# Altium PCB innovation-board.PcbDoc
Units mil, origin at the board's own origin, x right, y up, seen from the top; angles counter-clockwise.
Board outline 2000.98 x 1901.01 mil, 2 copper layers (Top Layer, Bottom Layer); 39 components, 47 nets, 163 pads, 104 vias.
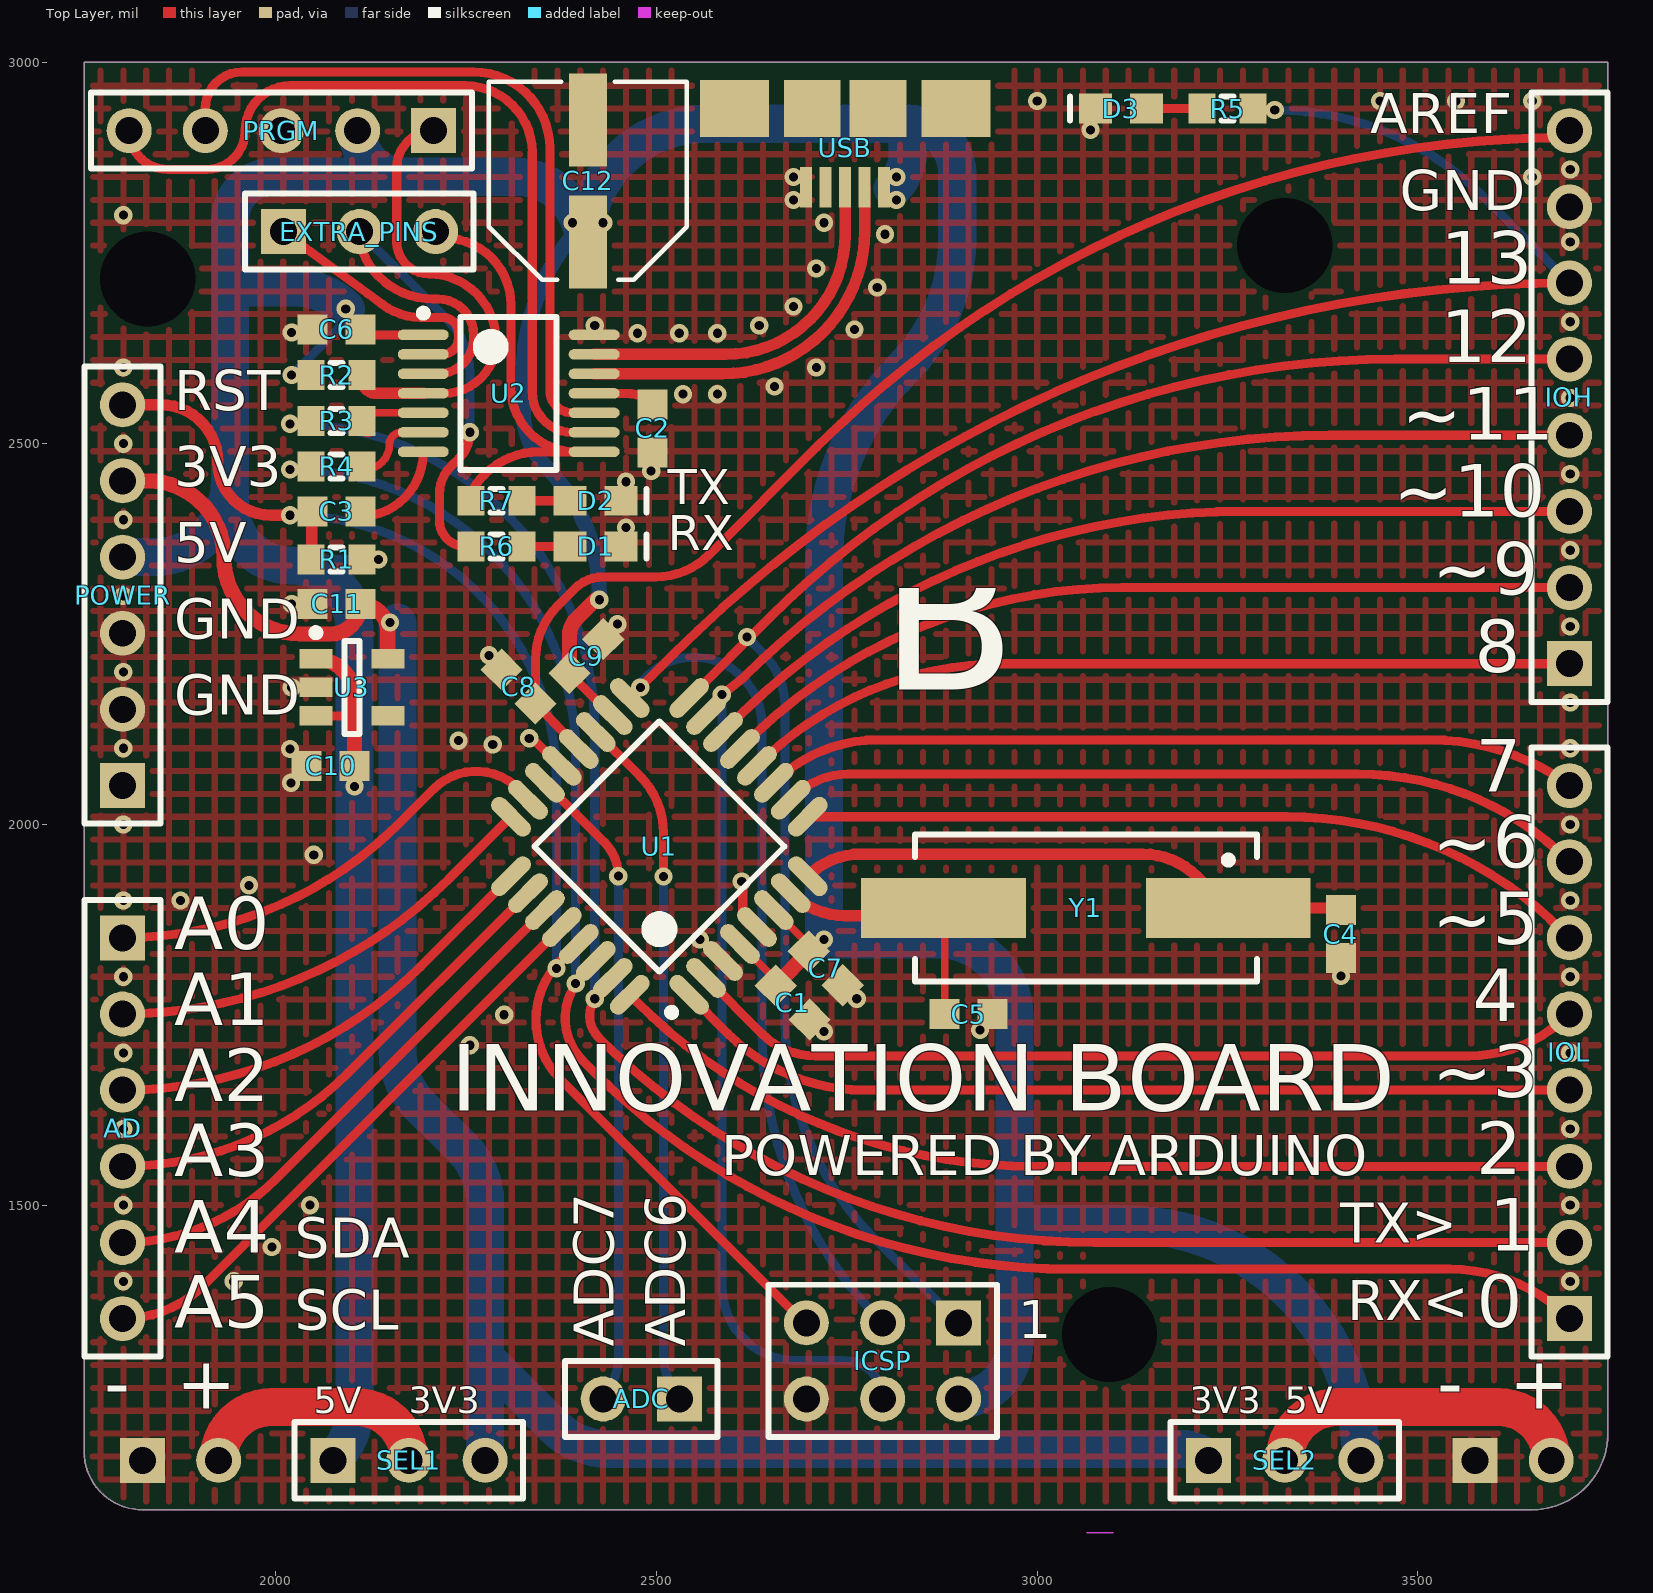
[diagram p0: Top Layer view]
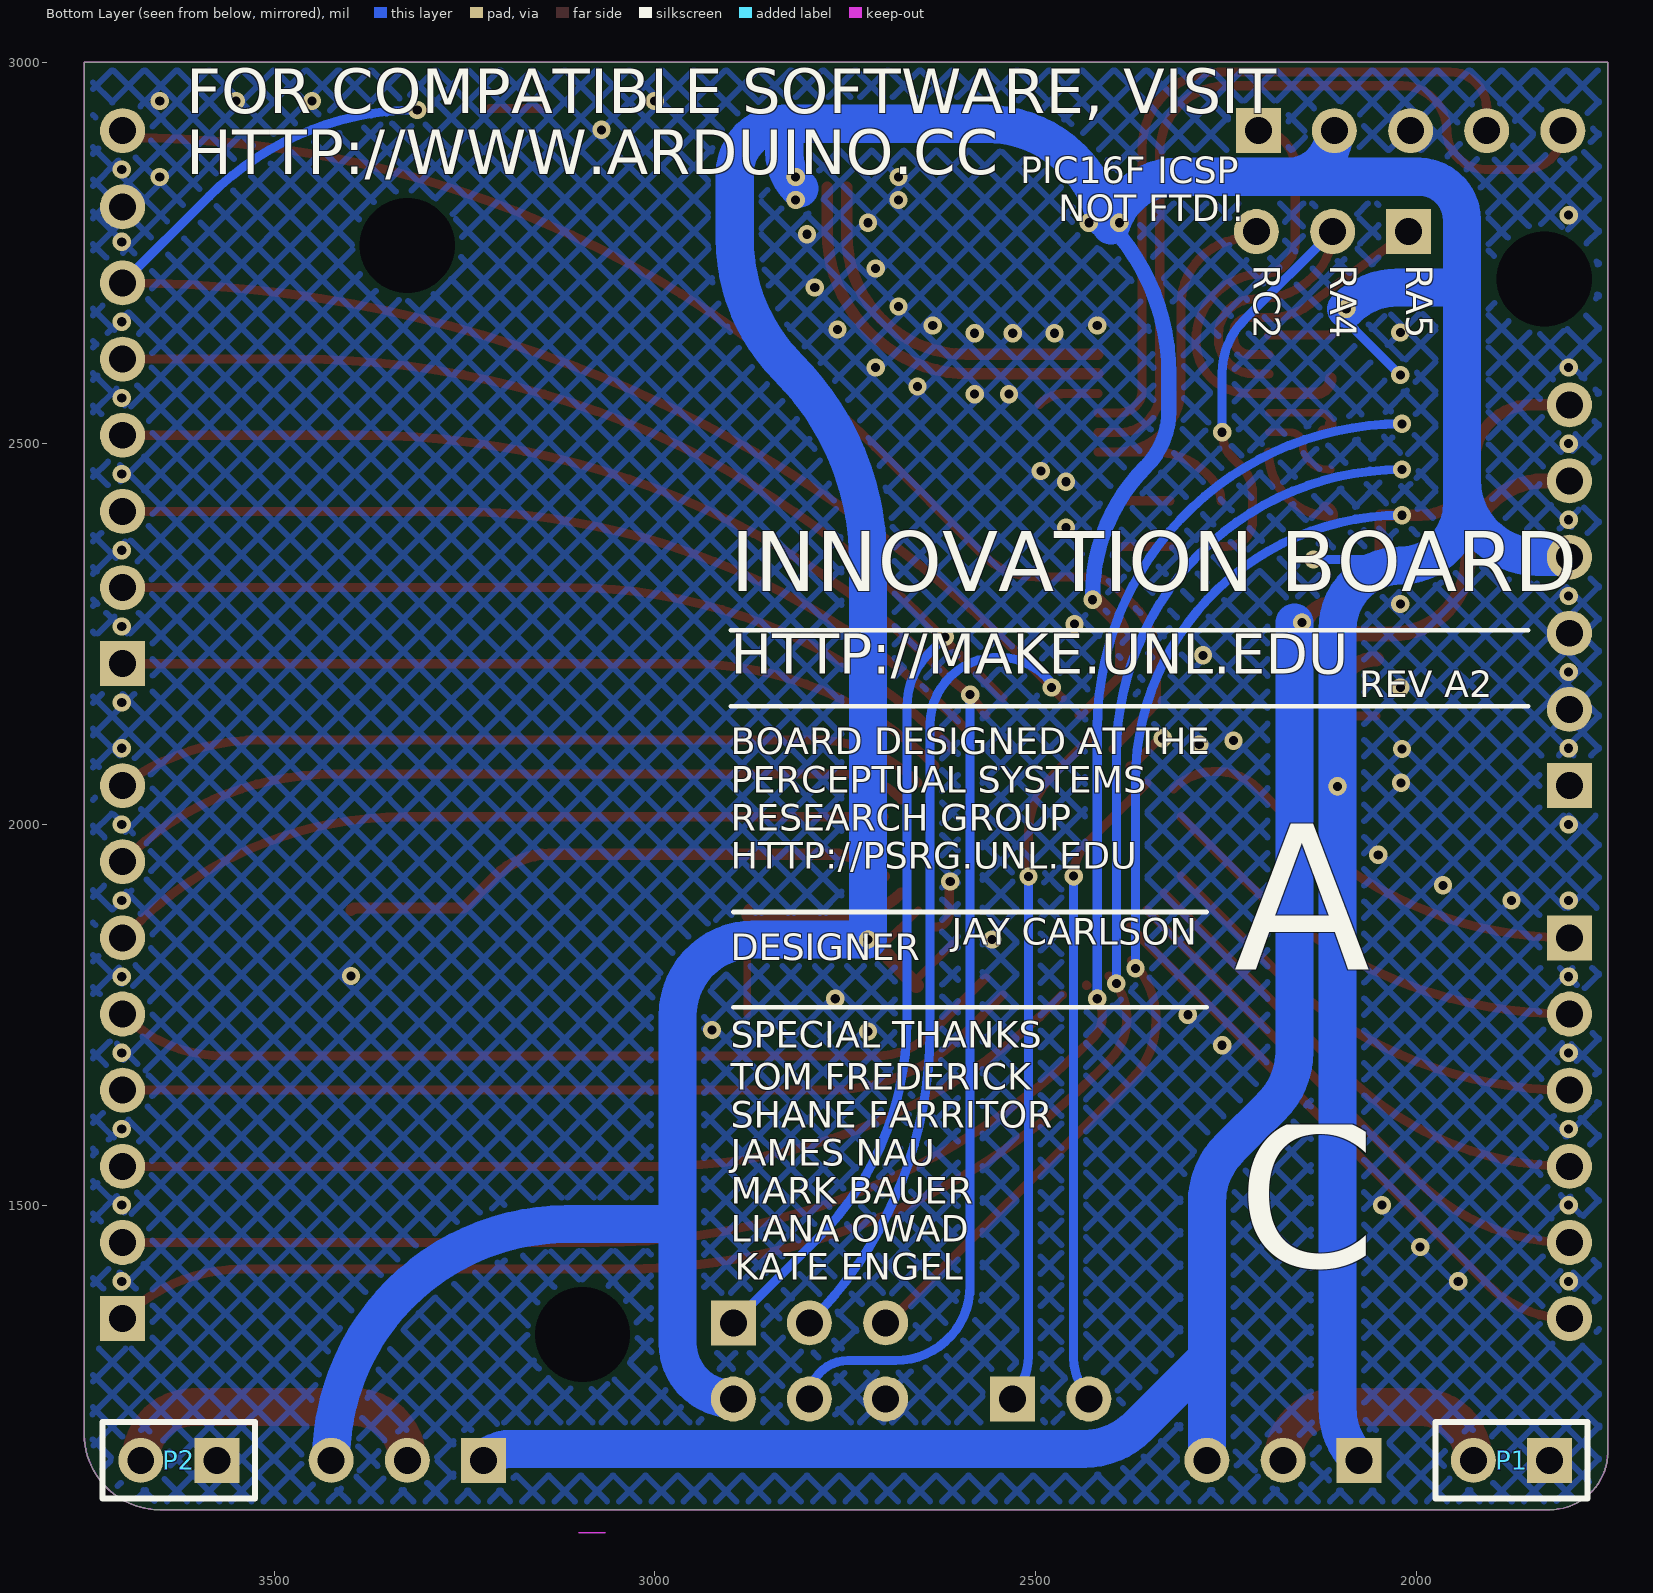
[diagram p1: Bottom Layer view, seen from below]
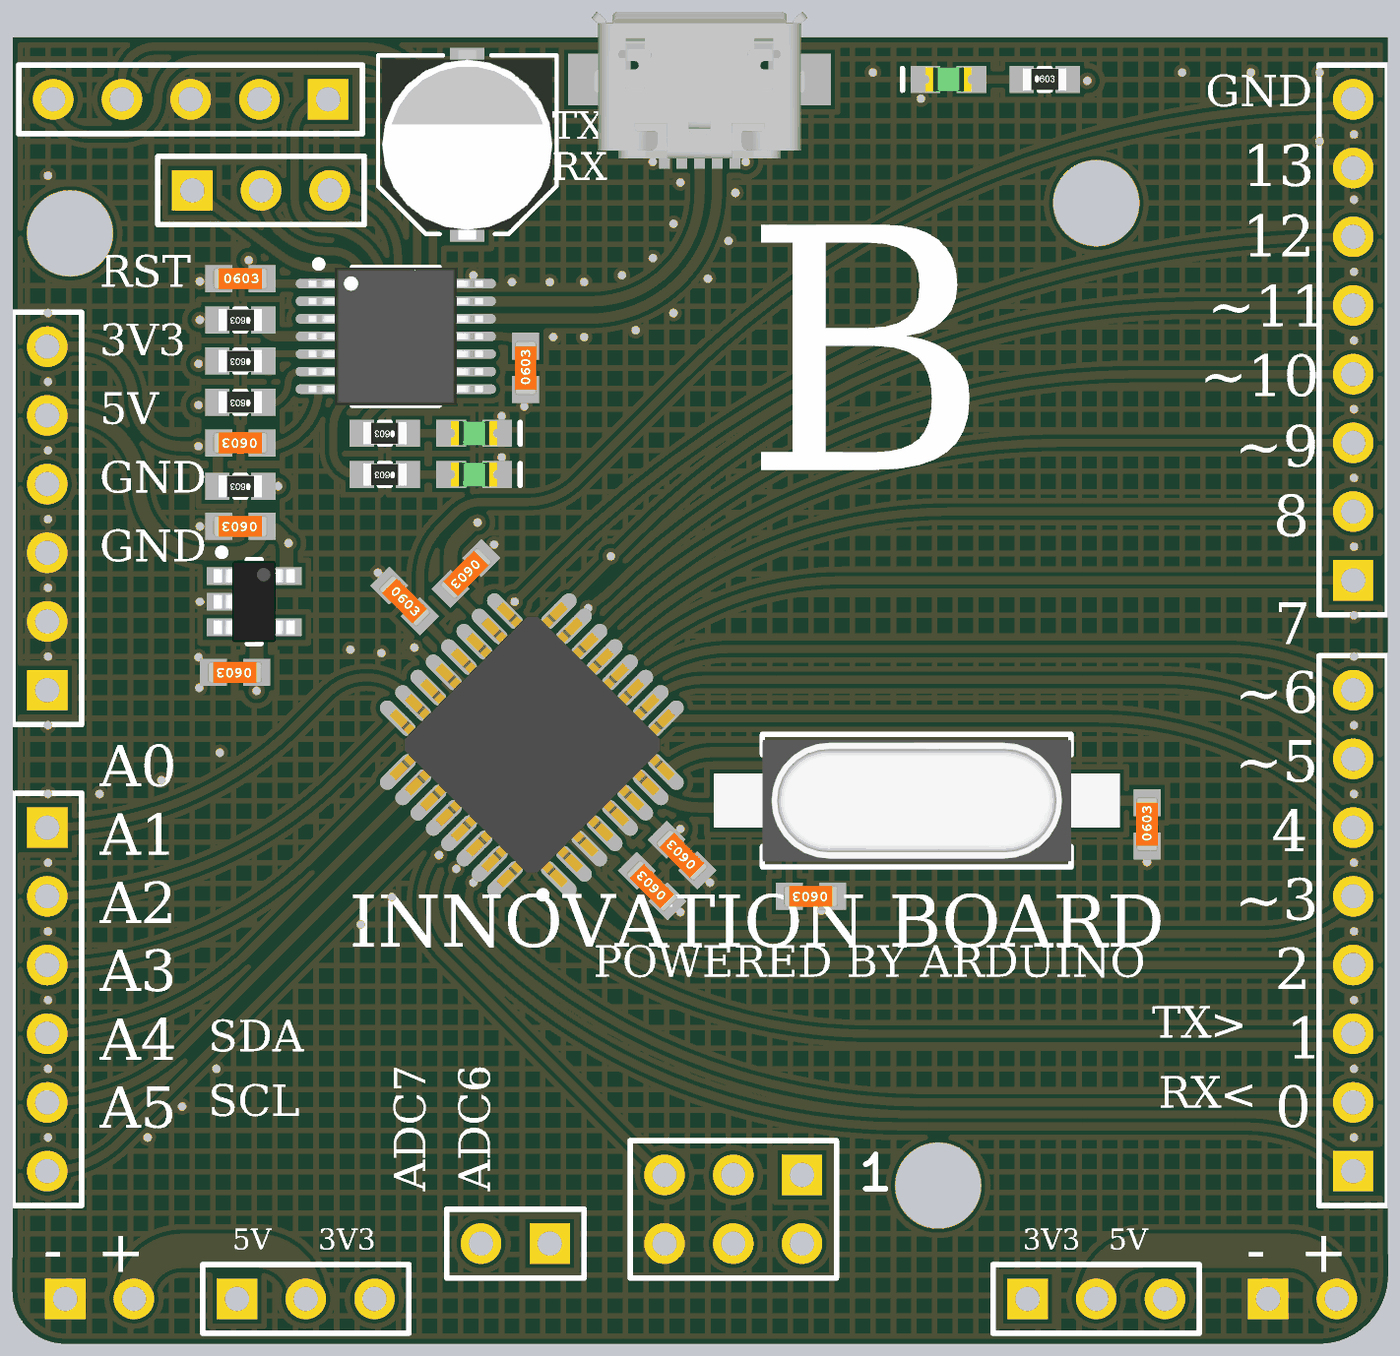
[diagram p2: 3D render of the assembled board from above, using the file's embedded part models]

## Layer stack, top to bottom
Top Solder: solder mask 0.4, Solder Resist, Dk 3.5
Top Layer: signal copper 1.4
Dielectric 1: dielectric 12.6, FR-4, Dk 4.8
Bottom Layer: signal copper 1.4
Bottom Solder: solder mask 0.4, Solder Resist, Dk 3.5

## Board outline
1748.42,1176.58 ccw(c1825,1176.58) 1825,1100 3649.4,1100 ccw(c3649.4,1200) 3749.4,1200 3749.4,1230.24 3748.9,1230.24 3748.9,3001.01 1748.9,3001.01 1748.9,1225 1748.42,1225

## Design rules (kind name [scope] priority, off if disabled: settings)
Clearance [All] p1: gap=6
DiffPairsRouting [All] p1: maxlimit=10 minlimit=6 mostfreqgap=10 toplayer_minwidth=6 toplayer_maxwidth=15 toplayer_prefwidth=8 bottomlayer_minwidth=6 bottomlayer_maxwidth=15 bottomlayer_prefwidth=8 maxuncoupledlength=500
HoleSize [All] p1: absolutevalues=TRUE maxlimit=500 minlimit=12 maxpercent=80.000 minpercent=20.000
PlaneConnect [All] p1: planeconnectstyle=Direct reliefexpansion=20 reliefentries=4 reliefconductorwidth=10 reliefairgap=10
PolygonConnect [All] p1: connectstyle=Direct reliefconductorwidth=10 reliefentries=4 polygonreliefangle="90 Angle" airgapwidth=10
RoutingVias [All] p1: holewidth=12 width=24 viastyle="Through Hole" minholewidth=12 minwidth=24 maxholewidth=28 maxwidth=50
SolderMaskExpansion [All] p1: expansion=0
Width [All] p1: maxlimit=500 minlimit=6 preferedwidth=8
26 further rules are at their usual default settings.

## Components (designator, comment, footprint, x,y, rotation, side; value= is the part's Value field where it differs from the comment)
AD "Female Header 6" HDR1X6 1798.9,1851.02 r270 top
ADC "DNI" HDR1X2 2530,1245.5 r180 top
C1 "100n" CAPC1608N 2678.9,1766.02 r135 top
C2 "1u 16V" CAPC1608N 2495,2520 r90 top
C3 "100n" CAPC1608N 2080,2411.01 r180 top
C4 "22p" CAPC1608N 3398.9,1856.02 r90 top
C5 "22p" CAPC1608N 2910,1751 r180 top
C6 "100n" CAPC1608N 2080,2650 r0 top
C7 "100n" CAPC1608N 2722.29,1811.02 r135 top
C8 "100n" CAPC1608N 2318.9,2181.01 r315 top
C9 "100n" CAPC1608N 2408,2221 r225 top
C10 "1u 16V" CAPC1608N 2072.04,2076.8 r180 top
C11 "1u 16V" CAPC1608N 2080,2289.46 r180 top
C12 "100u 6.3x5.4" CAP_63X54 2410,3015 r0 top
D1 "GREEN" LTST-C190GKT 2420,2365 r0 top
D2 "GREEN" LTST-C190GKT 2420,2425 r0 top
D3 "GREEN" LTST-C190GKT 3110,2940 r180 top
EXTRA_PINS "DNI" HDR1X3 2010,2778.5 r0 top
ICSP "DNI" HDR2X3 2896.93,1345.5 r180 top
IOH "Female Header 8" HDR1X8 3698.9,2211.01 r90 top
IOL "Female Header 8" HDR1X8 3698.9,1351.02 r90 top
P1 "DNI" HDR1X2 1825,1165 r0 bottom
P2 "DNI" HDR1X2 3575,1165 r0 bottom
POWER "Female Header 6" HDR1X6 1798.9,2051.01 r90 top
PRGM "DNI" HDR1X5 2207.54,2911.01 r180 top (schematic designator ICSP)
R1 "10k" RESC1608N 2080,2347.98 r180 top
R2 "10k" RESC1608N 2080,2590 r180 top
R3 "1k" RESC1608N 2080,2530 r180 top
R4 "1k" RESC1608N 2080,2470 r180 top
R5 "1k" RESC1608N 3250,2940 r0 top
R6 "1k" RESC1608N 2290,2365 r180 top
R7 "1k" RESC1608N 2290,2425 r180 top
SEL1 "DNI" HDR1X3 2075,1165 r0 top
SEL2 "DNI" HDR1X3 3225,1165 r0 top
U1 "ATMEGA328P-AUR" QFP80P900X900-32N 2503.9,1971.02 r135 top
U2 "PIC16F1454-I/ST" TSOP65P640-14AN 2306,2566 r0 top
U3 "AAT3221IGV-3.3-T1" SOT23-5AN 2100,2179.86 r0 top
USB "USB Micro B Receptacle" 10104110-0001LF 2747.88,2810.01 r180 top
Y1 "16MHz" HC49/4H_SMX 3063.9,1890.23 r180 top

## Footprints (in the part's own frame and the unit in brackets; to place one, negate y for a bottom-side part, rotate by r counter-clockwise, add the part's x,y. Pads: shape width x height; smd on the part's side, far side on the other; paste and mask are expansions set on the pad)
10104110-0001LF [mm]
  rect 2.3x1.9 smd: 0(-3.7,-3.3) 0(3.7,-3.3)
  rect 1.9x1.9 smd: 0(-1.1,-3.3) 0(1.1,-3.3)
  rect 0.4x1.35 smd: 1(-1.3,-0.675) 2(-0.65,-0.675) 3(0,-0.675) 4(0.65,-0.675) 5(1.3,-0.675)
  body extent -3.99,-5.8 3.99,-0.38, height 2.63
CAP_63X54 [mm] "Capacitor, Aluminum Electrolytic, 6.3mm diameter, 5.4mm height"
  rect 1.27x3.1 smd: 1(0,-6.35) 2(0,-2.286)
  silkscreen extent -3.3,-7.62 3.3,-1.02, body extent -3.15,-7.82 3.15,-0.82, height 6.62
CAPC1608N [mm] "Chip Capacitor (0603), Body 1.6x0.8mm, IPC Medium Density"
  rect 1x1 smd: 1(-0.8,0) 2(0.8,0)
  body extent -1,-0.39 1,0.39, height 0.79
HC49/4H_SMX [mm] "Quartz Crystal, SM; Body 13.4 (inc. leads) x 4.9 mm (LxW max)"
  rect 5.5x2 smd: 1(-4.75,0) 2(4.75,0)
  silkscreen extent -5.7,-2.45 5.7,2.45, body extent -7.5,-2.25 7.5,2.25, height 4.22
HDR1X2 [mm] "Connector; Header; 2 Position"
  rect 1.5x1.5 hole 0.9: 1(0,0)
  round 1.5 hole 0.9: 2(2.54,0)
  silkscreen extent -1.27,-1.27 3.81,1.27
HDR1X3 [mm] "Connector; Header; 3 Position"
  rect 1.5x1.5 hole 0.9: 1(0,0)
  round 1.5 hole 0.9: 2(2.54,0) 3(5.08,0)
  silkscreen extent -1.27,-1.27 6.35,1.27
HDR1X5 [mm] "Connector; Header; 5 Position"
  rect 1.5x1.5 hole 0.9: 1(0,0)
  round 1.5 hole 0.9: 2(2.54,0) 3(5.08,0) 4(7.62,0) 5(10.16,0)
  silkscreen extent -1.27,-1.27 11.43,1.27
HDR1X6 [mm] "Connector; Header; 6 Position"
  rect 1.5x1.5 hole 0.9: 1(0,0)
  round 1.5 hole 0.9: 2(2.54,0) 3(5.08,0) 4(7.62,0) 5(10.16,0) 6(12.7,0)
  silkscreen extent -1.27,-1.27 13.97,1.27
HDR1X8 [mm] "Connector; Header; 8 Position"
  rect 1.5x1.5 hole 0.9: 1(0,0)
  round 1.5 hole 0.9: 2(2.54,0) 3(5.08,0) 4(7.62,0) 5(10.16,0) 6(12.7,0) 7(15.24,0) 8(17.78,0)
  silkscreen extent -1.27,-1.27 19.05,1.27
HDR2X3 [mm] "Connector; Header; 3x2 Position"
  rect 1.5x1.5 hole 0.9: 1(0,0)
  round 1.5 hole 0.9: 2(0,2.54) 3(2.54,0) 4(2.54,2.54) 5(5.08,0) 6(5.08,2.54)
  silkscreen extent -1.27,-1.27 6.35,3.81
LTST-C190GKT [mm] "Blue LED, 0603"
  rect 1.1x1 smd: 1(-0.85,0) 2(0.85,0)
  silkscreen extent 1.7,-0.4 1.7,0.4, body extent -0.85,-0.45 0.85,0.45, height 0.9
QFP80P900X900-32N [mm] "32-Pin Quad Flat Pack 0.8 mm Pitch"
  oval 1.65x0.55 smd: 1(-4.2,2.8) 2(-4.2,2) 3(-4.2,1.2) 4(-4.2,0.4) 5(-4.2,-0.4) 6(-4.2,-1.2) 7(-4.2,-2) 8(-4.2,-2.8) 17(4.2,-2.8) 18(4.2,-2) 19(4.2,-1.2) 20(4.2,-0.4) 21(4.2,0.4) 22(4.2,1.2) 23(4.2,2) 24(4.2,2.8)
  oval 0.55x1.65 smd: 9(-2.8,-4.2) 10(-2,-4.2) 11(-1.2,-4.2) 12(-0.4,-4.2) 13(0.4,-4.2) 14(1.2,-4.2) 15(2,-4.2) 16(2.8,-4.2) 25(2.8,4.2) 26(2,4.2) 27(1.2,4.2) 28(0.4,4.2) 29(-0.4,4.2) 30(-1.2,4.2) 31(-2,4.2) 32(-2.8,4.2)
  silkscreen extent -4.32,-2.95 2.95,3.75, body extent -4.5,-4.52 4.5,4.48, height 1.6
RESC1608N [mm] "Chip Resistor, Body 1.6x0.8mm, IPC Medium Density"
  rect 0.9x1 smd: 1(-0.85,0) 2(0.85,0)
  silkscreen extent -0.2,-0.4 0.2,0.4, body extent -0.8,-0.41 0.8,0.41, height 0.45
SOT23-5AN [mm] "SOT23, 5-Leads, Body 2.9x1.6mm, Pitch 0.95mm, Lead Span 2.8mm, IPC Medium Density"
  rect 1.1x0.65 smd: 1(-1.2,0.95) 2(-1.2,0) 3(-1.2,-0.95) 4(1.2,-0.95) 5(1.2,0.95)
  silkscreen extent -1.32,-1.55 0.25,1.95, body extent -1.5,-1.5 1.5,1.5, height 1.3
TSOP65P640-14AN [mm] "TSOP, 14-Leads, Body 5x4.4mm, Pitch 0.65mm, IPC Medium Density"
  oval 1.7x0.35 smd: 1(-2.85,1.95) 2(-2.85,1.3) 3(-2.85,0.65) 4(-2.85,0) 5(-2.85,-0.65) 6(-2.85,-1.3) 7(-2.85,-1.95) 8(2.85,-1.95) 9(2.85,-1.3) 10(2.85,-0.65) 11(2.85,0) 12(2.85,0.65) 13(2.85,1.3) 14(2.85,1.95)
  silkscreen extent -2.97,-2.55 1.6,2.8, body extent -3.23,-2.55 3.23,2.55, height 1.25

## Part data
AD POWER: library part "Header 6", "Female Header, 6-Pin"
ADC P1 P2: library part "Header 2", "Header, 2-Pin"
C1 C2 C3 C4 C5 C6 C7 C8 C9: library part "Cap Semi", "Capacitor (Semiconductor SIM Model)"
C10 C11: library part "Cap Semi", "MC0402X105M6R3CT"
C12: library part "Cap Pol1", "Polarized Capacitor (Radial)"
D1 D2 D3: library part LED_GREEN, "Typical greenGaAs LED"
EXTRA_PINS SEL1 SEL2: library part "Header 3", "Header, 3-Pin"
ICSP: library part "Header 3X2", "Header, 3-Pin, Dual row"
IOH IOL: library part "Header 8", "Female Header, 8-Pin"
PRGM: library part "Header 5", "Header, 5-Pin"
R1 R2 R3 R4 R5 R6 R7: library part "Res Semi", "Semiconductor Resistor"
U1: "ATMEL - ATMEGA328P-AUR - MCU, 8BIT, ATMEGA, 20MHZ, TQFP-32"
U2: "8-bit Microcontrollers - MCU 7 KB Flash 512 bytes RAM 48 MHz Int Osc"
U3: "3V3 Regulator"
Y1: library part XTAL, "Crystal Oscillator (2 pin)"

## Free pads (board coordinates)
  round 60 hole 125: MH(1832,2716) MH(3095,1330) MH(3325,2760)

## Via types
v1: diameter 24, hole 12, Top Layer to Bottom Layer, tented both sides, 104 vias

## Nets (pads, with @x,y where several pads share a name; then routed paths per layer and width w, separated by ;. In a path a pad name is that pad's centre, name@x,y a point inside that pad or via, vN(x,y) a via of type N, cw(c..) or ccw(c..) an arc to the next point about the centre after c; other vN are vias at no path point)
3V3: C11.1 POWER.5 SEL1.3 SEL2.1 U3.5 | length 2681.3
  Top Layer w20: POWER.5 1832,2451.01 cw(c1832,2351.01) 1932,2351.01 1932,2350 ccw(c2032,2350) 2032,2250 2072.04,2250 ccw(c2072.04,2289.46) C11.1 cw(c2111.5,2253.71) 2147.24,2253.71 U3.5
  Bottom Layer w50: v1@2160.21,2265 2160.21,1701.21 ccw(c2260.21,1701.21) 2189.5,1630.5 2245.71,1574.29 cw(c2175,1503.58) 2275,1503.58 2275,1300 ; SEL1.3 2275,1300 ; SEL2.1 ccw(c3188.79,1128.79) 3188.79,1180 2436.42,1180 cw(c2436.42,1280) 2365.71,1209.29 2275,1300
  other v1: 2150,2265
5V: C1.2 C6.2 C7.2 C9.2 C10.1 C12.1 ICSP.2 POWER.4 PRGM.2 R1.1 R2.2 SEL1.1 SEL2.3 U1.4 U1.6 U1.18 U2.1 U3.1 U3.3 USB.1 | length 7423.6
  Top Layer w10: U1.4 2656.63,1796.02 C1.2 ; U1.6 C7.2@2700.02,1841.71
  Top Layer w12: U3.3 2101.07,2142.46 cw(c2101.07,2140) 2103.53,2140 ; C6.2@2110.5,2645 ccw(c2112.72,2645) 2112.72,2642.77 U2.1 ; C9.2 2439.56,2144.9 ccw(c2442.65,2147.99) U1.18
  Top Layer w20: U3.1 cw(c2052.76,2166.49) 2103.53,2166.49 2103.53,2140 C10.1 ; C9.2 2385.73,2247.62 cw(c2417.38,2247.62) 2395,2270 2420,2295 v1(2425,2295) ; C1.2 C7.2
  Bottom Layer w12: 1991.87,2345.47 cw(c2000.56,2331.71) 2000.56,2347.98 v1(2135,2347.98) ; v1(2021,2590) 2080.69,2649.69 ccw(c2053.37,2677) v1(2092,2677)
  Bottom Layer w20: 2408.81,2794.71 ccw(c2611.15,2592.37) 2401,2786.59 ccw(c2611.15,2592.37) 2325,2592.37 2325,2542.43 ccw(c2427.43,2542.43) 2355,2470 cw(c2186.01,2301.01) 2425,2301.01 v1(2425,2295)
  Bottom Layer w50: POWER.4 1840,2351.01 ccw(c1840,2451.01) 1940,2451.01 ; SEL1.1 ccw(c2006.12,1233.88) 2103.53,1233.88 v1(2103.53,2050) 2103.53,2256.47 ccw(c2020,2256.47) 2020,2340 cw(c2020,2420) 1940,2420 1940,2451.01 ; v1(2092,2677) ccw(c2024.4,2609.4) 2024.4,2705 1940,2705 ; PRGM.2 ccw(c2168.07,2911.01) 2168.07,2850.49 ; v1@2401,2786.59 ccw(c2314.51,2760) 2314.51,2850.49 2168.07,2850.49 ; 2408.81,2794.71 cw(c2565,2760) 2565,2920 2830,2920 ; 2810,2835 ccw(c2761.72,2883.28) 2830,2883.28 2830,2920 ; ICSP.2 ccw(c2896.93,1318.57) 2970,1318.57 2970,1475 ; SEL2.3 ccw(c3115,1165) 3115,1475 2970,1475 ; 1940,2451.01 1940,2705 ; 1940,2705 1940,2793.32 cw(c1997.16,2793.32) 1997.16,2850.49 2168.07,2850.49 ; 2830,2920 cw(c2830,2855) 2895,2855 2895,2768.99 cw(c2656.01,2768.99) 2825,2600 ccw(c3078.49,2346.51) 2720,2346.51 v1(2720,1849) 2870,1849 cw(c2870,1749) 2970,1749 2970,1475
  other v1: 2390,2790 2430,2790 2815,2820 2815,2850
AD0: AD.1 U1.23 | length 591.3
  Top Layer w12: AD.1 ccw(c1798.9,2365.18) 2162.47,2001.61 2207.54,2046.68 cw(c2263.22,1991.01) U1.23@2318.9,2046.68
AD1: AD.2 U1.24 | length 591.3
  Top Layer w12: AD.2 ccw(c1798.9,2357.35) 2227.65,1928.61 U1.24
AD2: AD.3 U1.25 | length 602.7
  Top Layer w12: AD.3 ccw(c1798.9,2204.12) 2190,1813.01 U1.25
AD3: AD.4 U1.26 | length 663
  Top Layer w12: AD.4 ccw(c1798.9,1970.23) 2095.33,1673.8 U1.26
ADC6: ADC.1 U1.19 | length 908.2
  Top Layer w12: U1.19 2478.53,2063.2 cw(c2404.28,1988.95) 2509.28,1988.95 v1(2509.28,1931.73)
  Bottom Layer w12: v1(2509.28,1931.73) 2509.28,1301.03 ccw(c2580.01,1301.03) ADC.1@2530,1251.01
ADC7: ADC.2 U1.22 | length 846.1
  Top Layer w12: U1.22 2431.57,1976.53 cw(c2387.08,1932.04) v1(2450,1932.04)
  Bottom Layer w12: ADC.2@2430,1251.02 ccw(c2381.72,1299.3) 2450,1299.3 v1(2450,1932.04)
AREF: C8.2 IOH.8 U1.20 | length 1787.6
  Top Layer w12: C8.2 C8.2@2341.17,2159.09 ; U1.20 2341.35,2158.91 C8.2@2341.17,2159.09 ; 3600.16,2898.73 cw(c3699.31,1174.89) 3619.11,2899.72 ; 3630.26,2900.2 ccw(c3699.31,1174.89) 3619.11,2899.72 ; 3660.38,2901.14 cw(c3699.31,1174.89) 3690.5,2901.56 ccw(c3690.52,1515.9) 3619.11,2899.72 ; C8.2@2341.17,2159.09 2341.17,2216.48 cw(c2441.17,2216.48) 2370.46,2287.19 2392.91,2309.64 cw(c2430,2272.55) 2430,2325 2498.58,2325 ccw(c2498.58,2425) 2569.29,2354.29 2710.71,2495.71 cw(c3690.52,1515.9) 3619.11,2899.72
D_N: U2.12 USB.2 | length 520
  Top Layer w15: U2.12 2586.56,2591.59 ccw(c2586.56,2778.5) 2773.48,2778.5 USB.2
D_P: U2.13 USB.3 | length 481.6
  Top Layer w15: U2.13 2590.73,2617.18 ccw(c2590.73,2774.33) 2747.88,2774.33 USB.3
DTR: C3.1 U2.7 | length 149.2
  Top Layer w10: C3.1@2110.4,2406.01 C3.1@2110.58,2406.01
  Top Layer w12: C3.1@2109.5,2404 ccw(c2109.5,2488.3) 2193.8,2488.3 U2.7
  Top Layer w15: C3.1@2110.4,2406.01 cw(c2120.4,2406.01) C3.1@2120.4,2416.01
GND: C1.1 C2.1 C4.1 C5.1 C6.1 C7.1 C8.1 C9.1 C10.2 C11.2 C12.2 D1.2 D2.2 D3.2 ICSP.6 IOH.7 P1.1 P2.1 POWER.2 POWER.3 PRGM.3 U1.3 U1.5 U1.21 U2.14 U3.2 USB.5 | length 131.8
  Top Layer w12: v1(2333,2113) 2337,2113 2373.2,2076.8 U1.21 ; v1(2612,1925) 2613.41,1923.59 2613.41,1883.77 ccw(c2631.96,1883.77) U1.5
  Bottom Layer w12: v1@2330,2113 v1(2333,2113)
  other v1: 1800,1400 1945,1400 3700,1400 1995,1445 1800,1500 2045,1500 3700,1500 1800,1600 3700,1600 1800,1700 3700,1700 2255,1710 2720,1728 2925,1730 2300,1750 2763,1771 1800,1800 3700,1800 3398.9,1801.01 2557,1849 1800,1900 1875,1900 3700,1900 1965,1920 2050,1960 1800,2000 3700,2000 2020,2054.53 2018.9,2099.07 1800,2100 3700,2100 2285,2105 2240,2110 3700,2160 2021,2179.86 1800,2200 2280,2222 3700,2260 2449,2263 2021,2289.46 1800,2300 3700,2360 2460,2390 1800,2400 2460,2450 3700,2460 2493,2464 1800,2500 3700,2560 2535,2565 2580,2565 2655,2575 1800,2600 2710,2600 2475,2645 2530,2645 2580,2645 2021,2646 2760,2650 2418.9,2655.01 2635,2655 3700,2660 2680,2680 2790,2705 2710,2730 3700,2765 2800,2775 2720,2790 1800,2800 2680,2820 2680,2850 3650,2850 3700,2860 3070,2912 3000,2950 3450,2950 3550,2950 3650,2950
ICSPCLK: PRGM.5 U2.9 | length 1097.5
  Top Layer w12: PRGM.5 ccw(c1858.56,2911.01) 1858.56,2860 1908.98,2860 ccw(c1908.98,2911.01) 1960,2911.01 cw(c2019,2911.01) 2019,2970.01 2249.07,2970.01 cw(c2249.07,2882.09) 2337,2882.09 2337,2567.24 ccw(c2389.42,2567.24) 2389.42,2514.82 U2.9
ICSPDAT: PRGM.4 U2.10 | length 930.1
  Top Layer w12: PRGM.4@1907.54,2939.94 cw(c1955.62,2939.94) 1955.62,2988.01 2260,2988.01 cw(c2260,2888.01) 2360,2888.01 2360,2570 ccw(c2389.59,2570) 2389.59,2540.41 U2.10
IO2: IOL.3 U1.32 | length 1295.4
  Top Layer w12: U1.32 2473.46,1767.61 ccw(c2996.36,2290.51) 2996.36,1551.01 IOL.3
IO3: IOL.4 U1.1 | length 1197
  Top Layer w12: U1.1 2593.88,1725.14 ccw(c2772.83,1904.09) 2772.83,1651.01 IOL.4
IO4: IOL.5 U1.2 | length 1186.6
  Top Layer w12: U1.2 2638.26,1725.3 ccw(c2708.97,1796.02) 2708.97,1696.02 3566.12,1696.02 ccw(c3566.12,1883.8) IOL.5
IO5: IOL.6 U1.9 | length 1044
  Top Layer w12: U1.9 3328.07,2009.99 cw(c3328.07,1498.52) 3689.73,1860.18 IOL.6
IO6: IOL.7 U1.10 | length 1062.8
  Top Layer w12: U1.10 2680.97,2036.73 cw(c2751.68,1966.02) 2751.68,2066.02 3421.27,2066.01 cw(c3421.27,1673.38) IOL.7
IO7: IOL.8 U1.11 | length 1072.8
  Top Layer w12: U1.11 cw(c2790.59,1918.17) 2790.59,2111.02 3516.17,2111.01 cw(c3516.17,1800.27) 3696.65,2053.23 cw(c3554.05,1906.16) IOL.8
IO8: IOH.1 U1.12 | length 1102.8
  Top Layer w12: U1.12 cw(c2955.98,1752.78) 2955.98,2211.02 IOH.1
IO9: IOH.2 U1.13 | length 1146.9
  Top Layer w12: U1.13 2616.81,2106.2 cw(c3111.29,1611.72) 3111.29,2311.02 IOH.2
MCLR: PRGM.1 R2.1 U2.4 | length 606.4
  Top Layer w12: U2.4 2221,2566 ccw(c2221,2634.53) 2289.53,2634.53 ccw(c2201.1,2634.53) 2201.1,2722.95 cw(c2201.1,2765.06) 2159,2765.06 2159,2862.47 cw(c2207.54,2862.47) PRGM.1
  Top Layer w15: R2.1@2112.36,2586.01 ccw(c2132.36,2586.01) 2132.36,2566.01 U2.4
MISO/IO12: ICSP.1 IOH.5 U1.16 | length 2284.4
  Top Layer w12: U1.16 2647.43,2270.44 cw(c3469.65,1448.22) 3469.65,2611.02 IOH.5
  Bottom Layer w12: v1(2618.9,2246.01) 2639.61,2225.3 cw(c2568.9,2154.59) 2660.73,2194.19 cw(c2568.9,2154.59) 2668.9,2154.59 2668.9,1740.96 ccw(c3073.11,1740.96) 2787.29,1455.15 ICSP.1
MOSI/IO11: ICSP.4 IOH.4 U1.15 | length 2311.7
  Top Layer w12: U1.15 v1(2585.9,2170.37) 2613.41,2191.88 cw(c3383.87,1421.43) 3383.87,2511.02 IOH.4
  Bottom Layer w12: v1(2585.9,2170.37) 2585.9,1394.02 ccw(c2683.9,1394.02) 2683.9,1296.02 2746.42,1296.02 cw(c2746.42,1245.5) ICSP.4
NetC2_2: C2.2 U2.11 | length 80.7
  Top Layer w12: U2.11 2459.98,2566 cw(c2459.98,2516.48) C2.2
NetC4_2: C4.2 U1.8 Y1.1 | length 733.6
  Top Layer w15: U1.8 cw(c2768.72,1862.09) 2768.72,1961.01 3138.7,1961.01 cw(c3138.7,1861.01) 3209.41,1931.73 Y1.1 3392.34,1890.23 cw(c3392.34,1880.95) C4.2
NetC5_2: C5.2 U1.7 Y1.2 | length 349.8
  Top Layer w10: Y1.2 2878.5,1888.62 2878.5,1880.3 C5.2
  Top Layer w15: U1.7 2676.68,1909.59 ccw(c2747.39,1980.3) 2747.39,1880.3 Y1.2@2878.5,1880.3
NetD1_1: D1.1 R6.1 | length 63.1
  Top Layer w12: R6.1 D1.1
NetD2_1: D2.1 R7.1 | length 63.1
  Top Layer w12: R7.1 D2.1
NetD3_1: D3.1 R5.1 | length 73.1
  Top Layer w12: D3.1 R5.1
NetP1_2: P1.2 SEL1.2 | length 329.9
  Top Layer w50: P1.2 cw(c1995,1165) 1995,1235 2105,1235 cw(c2105,1165) SEL1.2
NetP2_2: P2.2 SEL2.2 | length 429.9
  Top Layer w50: SEL2.2 cw(c3395,1165) 3395,1235 3605,1235 cw(c3605,1165) P2.2
RA4: EXTRA_PINS.2 R6.2 U2.3 | length 831.4
  Top Layer w12: EXTRA_PINS.2 ccw(c2191,2778.5) 2133.72,2721.23 2135.67,2719.29 ccw(c2206.38,2790) 2206.38,2690 2213.24,2690 cw(c2213.24,2643.24) 2260,2643.24 2260,2638.35 cw(c2213.24,2638.35) 2213.24,2591.59 U2.3 ; v1(2255,2515) cw(c2206.72,2515) 2240.86,2480.86 2230,2470 ccw(c2266.21,2433.79) 2215,2433.79 2215,2399.14 ccw(c2249.14,2399.14) 2225,2375 ccw(c2249.14,2399.14) 2249.14,2365 R6.2
  Bottom Layer w12: EXTRA_PINS.2 2225.71,2662.79 cw(c2155,2592.08) 2255,2592.08 v1(2255,2515)
RA5: EXTRA_PINS.1 U2.2 | length 341.8
  Top Layer w12: EXTRA_PINS.1 2120.68,2697.12 2139.96,2682.95 ccw(c2190.08,2747.76) 2190.08,2665.83 2218.83,2665.83 cw(c2218.83,2644.66) 2240,2644.66 2240,2638.35 cw(c2218.83,2638.35) 2218.83,2617.18 U2.2
RC2: EXTRA_PINS.3 R7.2 U2.8 | length 571.2
  Top Layer w12: EXTRA_PINS.3@2221,2770 cw(c2221,2681.97) 2309.03,2681.97 2309.03,2573.82 ccw(c2393.62,2573.82) U2.8@2393.62,2489.23 ; R7.2 cw(c2296.46,2425) 2268.23,2453.23 2274.94,2459.94 cw(c2345.65,2389.23) 2345.65,2489.23 U2.8@2393.62,2489.23 ; U2.8 U2.8@2393.62,2489.23
RESET: C3.2 ICSP.5 POWER.6 R1.2 U1.29 | length 1815.5
  Top Layer w12: v1@2373.9,1821.02 ccw(c2451.68,1743.23) 2373.9,1665.45 2693.85,1345.5 ICSP.5
  Top Layer w15: POWER.6 1848.9,2551.01 cw(c1848.9,2476.01) 1923.9,2476.01 ccw(c1993.9,2476.01) 1993.9,2406.01 v1(2018.9,2406.01) 2047.4,2406.01 2047.4,2347.98 cw(c2045.44,2347.98) R1.2@2045.44,2346.01
  Bottom Layer w12: v1(2018.9,2406.01) cw(c2018.9,2056.01) 2368.9,2056.01 v1(2368.9,1811.02)
RX_IN: R3.1 U2.5 | length 105.4
  Top Layer w10: R3.1@2112.36,2526.01 cw(c2126.76,2526.01) 2126.76,2540.41 U2.5
  Top Layer w15: R3.1@2112.36,2526.01 ccw(c2122.36,2526.01) R3.1@2122.36,2516.01
RXD/IO0: IOL.1 R4.2 U1.30 | length 2400.8
  Top Layer w12: U1.30@2403.23,1801.02 ccw(c2458.91,1745.34) 2403.23,1689.66 2416.27,1676.62 ccw(c3045.43,2305.79) 3045.43,1416.01 3541.98,1416.02 cw(c3541.98,1194.09) IOL.1
  Bottom Layer w12: v1(2018.9,2466.01) cw(c2018.9,2091.01) 2393.9,2091.01 v1(2393.9,1791.02)
SCK/IO13: ICSP.3 IOH.6 R5.2 U1.17 | length 2905.4
  Top Layer w12: U1.17 v1(2478.9,2179.86) 2522.97,2223.93 cw(c3698.9,1048) IOH.6
  Bottom Layer w12: v1@2476.34,2181.67 cw(c2549.38,2130.3) 2638.67,2131.02 2638.67,1727.58 ccw(c3179.01,1727.58) ICSP.3 ; v1(3312,2938) cw(c3312,2551.93) 3584.99,2824.92 IOH.6
SCL/AD5: AD.6 U1.28 | length 783.4
  Top Layer w12: AD.6 ccw(c1798.9,1502.46) 1905.98,1395.37 U1.28
SDA/AD4: AD.5 U1.27 | length 723.2
  Top Layer w12: AD.5 ccw(c1798.9,1736.34) 2000.66,1534.59 U1.27
SS/IO10: IOH.3 U1.14 | length 1190.8
  Top Layer w12: U1.14 2600.46,2134.38 cw(c3268.3,1466.54) 3268.3,2411.01 IOH.3
TX_OUT: R4.1 U2.6 | length 109.3
  Top Layer w10: R4.1@2112.36,2466.01 2116.35,2466.01 ccw(c2116.35,2499) 2149.33,2499 cw(c2165.15,2499) 2165.15,2514.82 U2.6
TXD/IO1: IOL.2 R3.2 U1.31 | length 2392.9
  Top Layer w12: U1.31@2423.9,1776.14 ccw(c2451.74,1748.3) 2423.9,1720.47 ccw(c3074.41,2370.98) 3074.41,1451.01 IOL.2 ; U1.31@2432.69,1788.45 cw(c2503.9,1718.24) U1.31@2433.19,1788.95
  Bottom Layer w12: v1(2018.9,2526.01) cw(c2018.9,2126.01) 2418.9,2126.01 v1(2418.9,1771.02)
VIN: POWER.1
pads on no net: U3.4 USB.0 USB.4

## Polygon pours and split planes (outlines as drawn)
GND on Top Layer "GND" (hatched 90Degree grid 30 track 8, pour order 4): 1748.9,3001.01 3748.9,3001.01 3748.9,3001.02 3748.9,1199.5 cw(c3649.4,1199.5) 3649.4,1100 1825,1100 cw(c1825,1176.58) 1748.42,1176.58
GND on Bottom Layer "GND" (hatched 45Degree grid 30 track 8, pour order 6): 1748.9,3001.01 3748.9,3001.01 3748.9,1199.02 cw(c3649.4,1199.02) 3649.4,1099.52 1825.11,1099.52 cw(c1825.11,1176.58) 1748.05,1176.58

## Keep-outs
Keep-Out Layer:
  lines w2: 1748.42,1225 1748.42,1176.58 ccw(c1825,1176.58) 1825,1100 3649.4,1100 ccw(c3649.4,1200) 3749.4,1200 3749.4,1230.24 ; 1748.9,1225 1748.9,3001.01 3748.9,3001.01 3748.9,1305.52 3748.9,1240 3748.9,1230.24 ; 3065,1070 3100,1070

## Silkscreen, mask and mechanical layers (free items; w line width, h text height)
Top Overlay:
  text "AREF" at 3437.19,2890 h90
  text "GND" at 3475.75,2788.48 h90
  text "13" at 3529.67,2686.79 h118.11
  text "12" at 3529.67,2584.19 h118.11
  text "RST" at 1867,2526.01 h90
  text "~11" at 3478.63,2482.26 h118.11
  text "3V3" at 1867,2426.18 h90
  text "TX" at 2515,2405 h78.74
  text "~10" at 3467.26,2380.87 h118.11
  text "RX" at 2515,2345 h78.74
  text "5V" at 1867.08,2326.26 h90
  text "~9" at 3518.74,2278.39 h118.11
  text "GND" at 1867,2226.26 h90
  text "8" at 3574.38,2177 h118.11
  text "GND" at 1867,2126.35 h90
  text "B" at 2793,2044 h700
  text "7" at 3575.8,2020 h118.11
  text "~6" at 3518.74,1920.04 h118.11
  text "~5" at 3518.63,1819.64 h118.11
  text "A0" at 1867,1813 h118.11
  text "4" at 3572.08,1718.48 h118.11
  text "A1" at 1867,1713.03 h118.11
  text "~3" at 3518.74,1618.63 h118.11
  text "A2" at 1867,1613.61 h118.11
  text "INNOVATION BOARD" at 2230,1595 h150
  text "POWERED BY ARDUINO" at 2585,1521.31 h90
  text "2" at 3576.67,1517.47 h118.11
  text "A3" at 1867,1514.84 h118.11
  text "TX>" at 3398,1433 h90
  text "1" at 3593.61,1416.96 h118.11
  text "A4" at 1867,1414.77 h118.11
  text "SDA" at 2025,1413 h90
  text "RX<" at 3407,1331 h90
  text "SCL" at 2025,1319 h90
  text "0" at 3577,1317 h118.11
  text "A5" at 1867,1316 h118.11
  text "ADC7" at 2461.37,1313.88 h90 r90
  text "ADC6" at 2555.37,1313.88 h90 r90
  text "5V" at 2050,1215 h60
  text "3V3" at 2175,1215 h60
  text "3V3" at 3200,1215 h60
  text "5V" at 3325,1215 h60
  text "-  +" at 1775,1210 h118.11
  text "-  +" at 3525,1210 h118.11
Bottom Overlay:
  lines w6: 1853,2155 2900,2155 ; 1853,2255 2900,2255 ; 2275,1760 2897,1760 ; 2275,1885 2897,1885
  text "FOR COMPATIBLE SOFTWARE, VISIT" at 3615,2915 h100
  text "HTTP://WWW.ARDUINO.CC" at 3615,2835 h100
  text "PIC16F ICSP" at 2520,2830 h60
  text "NOT FTDI!" at 2470,2780 h60
  text "RA5" at 2025,2735 h60 r90
  text "RA4" at 2125,2735 h60 r90
  text "RC2" at 2225,2735 h60 r90
  text "INNOVATION BOARD" at 2900,2280 h135
  text "HTTP://MAKE.UNL.EDU" at 2900,2180 h90
  text "REV A2" at 2075,2155 h60
  text "BOARD DESIGNED AT THE" at 2900,2080 h60
  text "PERCEPTUAL SYSTEMS" at 2900,2030 h60
  text "RESEARCH GROUP" at 2900,1980 h60
  text "HTTP://PSRG.UNL.EDU" at 2900,1930 h60
  text "JAY CARLSON" at 2610,1830 h60
  text "DESIGNER" at 2900,1810 h60
  text "A" at 2240,1735 h393.7
  text "SPECIAL THANKS" at 2900,1695 h60
  text "TOM FREDERICK" at 2900,1640 h60
  text "SHANE FARRITOR" at 2900,1590 h60
  text "JAMES NAU" at 2900,1540 h60
  text "MARK BAUER" at 2900,1490 h60
  text "LIANA OWAD" at 2900,1440 h60
  text "KATE ENGEL" at 2895,1390 h60
  text "C" at 2235,1335 h445
  text "B" at 4480,850 h2100

## Text inside footprints (layer, text, board x,y; h text height)
ICSP: Top Overlay "1" at 2975,1325 h50